# EAGLE board pololu-steppers-power-side (EAGLE 5.03)
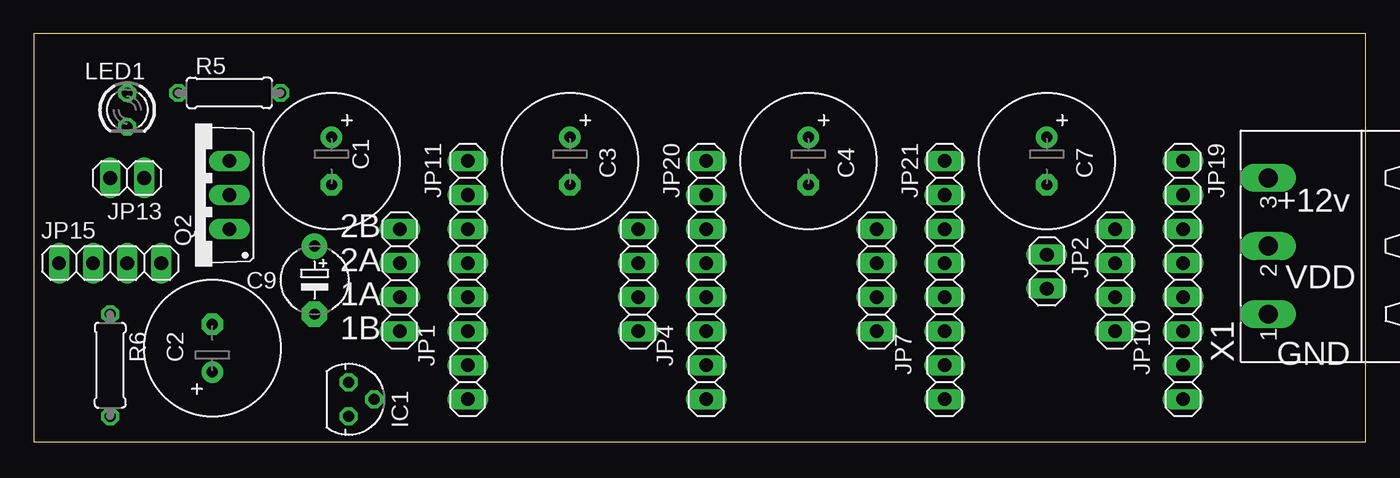
[diagram p0: board, top side]
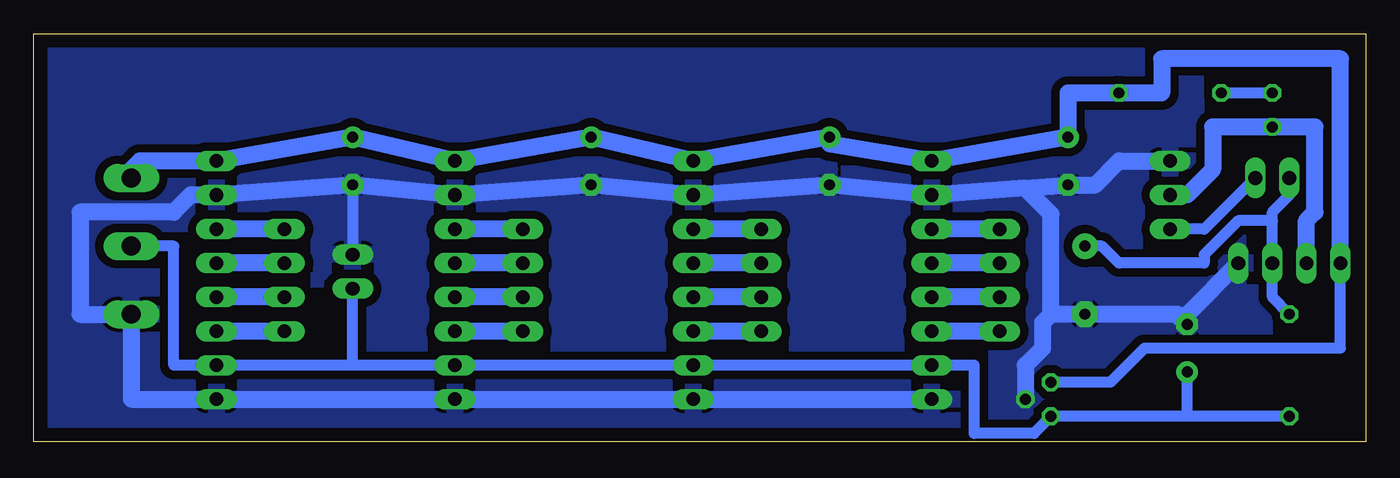
[diagram p1: board, bottom side, seen from below]

Size 99.36 x 30.47 mm. Coordinates in mm from the lower left corner, seen from the top.
Outline: 0,0 99.36,0 99.36,30.47 0,30.47 0,0
Copper layers (1*16): Top 0.035mm / dielectric 1.5mm / Bottom 0.035mm
Design rules "default": minimum track width 10mil, minimum drill 24mil, track to track 8mil, track to pad 8mil, pad to pad 8mil, via to via 8mil, smd to smd 8mil, copper to edge 40mil, drill to drill 8mil, minimum pad ring 10mil, minimum via ring 8mil, stop-mask expansion 4mil, vias tented up to drill 0mil, thermal gap 10mil

## Footprints (pad centres in the part's own frame; a part is rotated, then mirrored left to right if it is on the bottom)
E3,5-10 = drill 0.813 pad 1.6 round: + -1.778,0 | drill 0.813 pad 1.6 octagon: - 1.778,0
E5-5 = drill 0.813 pad 1.905 round: + -2.54,0 | drill 0.813 pad 1.905 octagon: - 2.54,0
78LXX = drill 0.813 octagon: GND 0,1.905; IN 1.27,0; OUT -1.27,0
1X04 = drill 1.016 long: 1 -3.81,0; 2 -1.27,0; 3 1.27,0; 4 3.81,0
1X02 = drill 1.016 long: 1 -1.27,0; 2 1.27,0
1X08 = drill 1.016 long: 1 -8.89,0; 2 -6.35,0; 3 -3.81,0; 4 -1.27,0; 5 1.27,0; 6 3.81,0; 7 6.35,0; 8 8.89,0
LED3MM = drill 0.813 octagon: A -1.27,0; K 1.27,0
TO220BV = drill 1.016 long: D 0,-2.54; G -2.54,-2.54; S 2.54,-2.54
0207/7 = drill 0.813 octagon: 1 -3.81,0; 2 3.81,0
MSTBA3 = drill 1.397 long: 1 -5.08,5.08; 2 0,5.08; 3 5.08,5.08

## Placement (x,y rotation side)
C1  100uF  [E3,5-10]  22.23,20.96 270 top
C2  100uF  [E3,5-10]  13.34,6.98 90 top
C3  100uF  [E3,5-10]  40.01,20.96 270 top
C4  100uF  [E3,5-10]  57.78,20.96 270 top
C7  100uF  [E3,5-10]  75.56,20.96 270 top
C9  10uF  [E5-5]  20.96,12.07 270 top
IC1  78L05  [78LXX]  23.5,3.18 270 top
JP1  [1X04]  27.3,12.07 90 top
JP2  [1X02]  75.56,12.7 270 top
JP4  [1X04]  45.09,12.07 90 top
JP7  [1X04]  62.86,12.07 90 top
JP10  [1X04]  80.64,12.07 90 top
JP11  [1X08]  32.38,12.07 270 top
JP13  [1X02]  6.99,19.68 180 top
JP15  [1X04]  5.71,13.34 0 top
JP19  [1X08]  85.72,12.07 270 top
JP20  [1X08]  50.16,12.07 270 top
JP21  [1X08]  67.95,12.07 270 top
LED1  [LED3MM]  6.99,24.76 270 top
Q2  75337P  [TO220BV]  12.07,18.42 90 top
R5  1K  [0207/7]  14.61,26.04 0 top
R6  4.7K  [0207/7]  5.71,5.71 270 top
X1  MSTBA3  [MSTBA3]  97.16,14.61 90 top

## Library data of the parts
C1-C4 C7 C9 R5 R6 = rcl
IC1 = v-reg
JP1 JP2 JP4 JP7 JP10 JP11 JP13 JP15 JP19-JP21 = pinhead
LED1 = led
Q2 = transistor-power
X1 = con-phoenix-508

## Nets
+12V: C1.+ C3.+ C4.+ C7.+ IC1.OUT JP11.1 JP15.1 JP19.1 JP20.1 JP21.1 R5.2 X1.3
GND: C1.- C2.- C3.- C4.- C7.- C9.- IC1.GND JP2.1 JP11.2 JP11.8 JP15.4 JP19.2 JP19.8 JP20.2 JP20.8 JP21.2 JP21.8 Q2.S X1.1
N$4: JP4.4 JP20.3
N$5: JP4.3 JP20.4
N$8: JP1.4 JP11.3
N$9: JP1.3 JP11.4
N$10: JP1.2 JP11.5
N$11: JP1.1 JP11.6
N$12: JP4.2 JP20.5
N$13: JP4.1 JP20.6
N$23: JP7.4 JP21.3
N$24: JP7.3 JP21.4
N$25: JP7.2 JP21.5
N$26: JP7.1 JP21.6
N$33: JP10.4 JP19.3
N$34: JP10.3 JP19.4
N$35: JP10.2 JP19.5
N$36: JP10.1 JP19.6
N$41: JP13.1 Q2.G
N$42: JP15.2 LED1.K Q2.D
N$43: LED1.A R5.1
N$44: C9.+ JP13.2 JP15.3 R6.1
VCC: C2.+ IC1.IN JP2.2 JP11.7 JP19.7 JP20.7 JP21.7 R6.2 X1.2

## Tracks (layer width: path | path; a pad name or v marks a point on that pad's centre or on a via)
+12V
  Bottom 0.254: 40.01,22.22 C3.+
  Bottom 0.813: IC1.OUT 19.05,4.45 16.51,6.98 1.91,6.98 JP15.1
  Bottom 1.27: X1.3 92.08,20.32 91.44,20.96 JP19.1 C7.+ JP21.1 C4.+ JP20.1 C3.+ | 40.01,22.22 JP11.1 C1.+ 22.23,26.04 R5.2 15.24,26.04 15.24,28.57 1.91,28.57 JP15.1
GND
  Bottom 0.813: C7.- JP2.1
  Bottom 1.27: JP11.8 JP20.8 JP21.8 JP19.8 92.08,3.18 X1.1 95.89,9.52 95.89,17.14 88.9,17.14 87.63,18.42 JP19.2 C7.- JP21.2 C4.- JP20.2 C3.- JP11.2 25.44,18.94 | 25.44,18.94 C1.- 20.19,19.18 18.41,20.96 Q2.S | 23.5,9.52 C9.- 14.1,9.52 C2.- 13.34,9.52 JP15.4 | 23.5,9.52 23.5,16.99 25.44,18.94 | IC1.GND 25.4,5.71 24.13,6.98 24.13,8.89 23.5,9.52
  pour Bottom (isolate 0.61): -0.64,31.11 -0.64,-0.63 100.33,-0.63 100.33,31.11
N$4
  Bottom 1.27: JP4.4 JP20.3
N$5
  Bottom 1.27: JP4.3 JP20.4
N$8
  Bottom 1.27: JP1.4 JP11.3
N$9
  Bottom 1.27: JP1.3 JP11.4
N$10
  Bottom 1.27: JP1.2 JP11.5
N$11
  Bottom 1.27: JP1.1 JP11.6
N$12
  Bottom 1.27: JP4.2 JP20.5
N$13
  Bottom 1.27: JP4.1 JP20.6
N$23
  Bottom 1.27: JP7.4 JP21.3
N$24
  Bottom 1.27: JP7.3 JP21.4
N$25
  Bottom 1.27: JP7.2 JP21.5
N$26
  Bottom 1.27: JP7.1 JP21.6
N$33
  Bottom 1.27: JP10.4 JP19.3
N$34
  Bottom 1.27: JP10.3 JP19.4
N$35
  Bottom 1.27: JP10.2 JP19.5
N$36
  Bottom 1.27: JP10.1 JP19.6
N$41
  Bottom 0.813: Q2.G 12.07,15.88 JP13.1
N$42
  Bottom 1.27: Q2.D 13.34,18.42 11.43,20.32 11.43,23.5 LED1.K 3.81,23.5 3.81,17.14 4.44,16.51 JP15.2
N$43
  Bottom 0.813: LED1.A R5.1
N$44
  Bottom 0.813: R6.1 6.99,10.79 JP15.3 6.99,16.51 | 6.99,16.51 6.99,17.14 5.71,18.42 JP13.2 | C9.+ 19.69,14.61 18.41,13.34 12.07,13.34 12.07,13.97 9.53,16.51 6.99,16.51
VCC
  Bottom 0.813: X1.2 88.9,14.61 88.9,5.71 JP19.7 75.56,5.71 | 75.56,5.71 JP21.7 JP20.7 JP11.7 29.21,5.71 29.21,0.63 24.77,0.63 IC1.IN 13.34,1.91 | 75.56,5.71 JP2.2 | R6.2 13.34,1.91 | 13.34,1.91 C2.+

## Text on the board
tPlace: +12v | 2B | 2A | VDD | 1A | 1B | GND